# Altium PCB MDBT42Q - Copy (2).PcbDoc
Units mm, origin at the board's own origin, x right, y up, seen from the top; angles counter-clockwise.
Board outline 26.67 x 44.45 mm, 2 copper layers (Top Layer, Bottom Layer); 23 components, 17 nets, 145 pads, 0 vias.
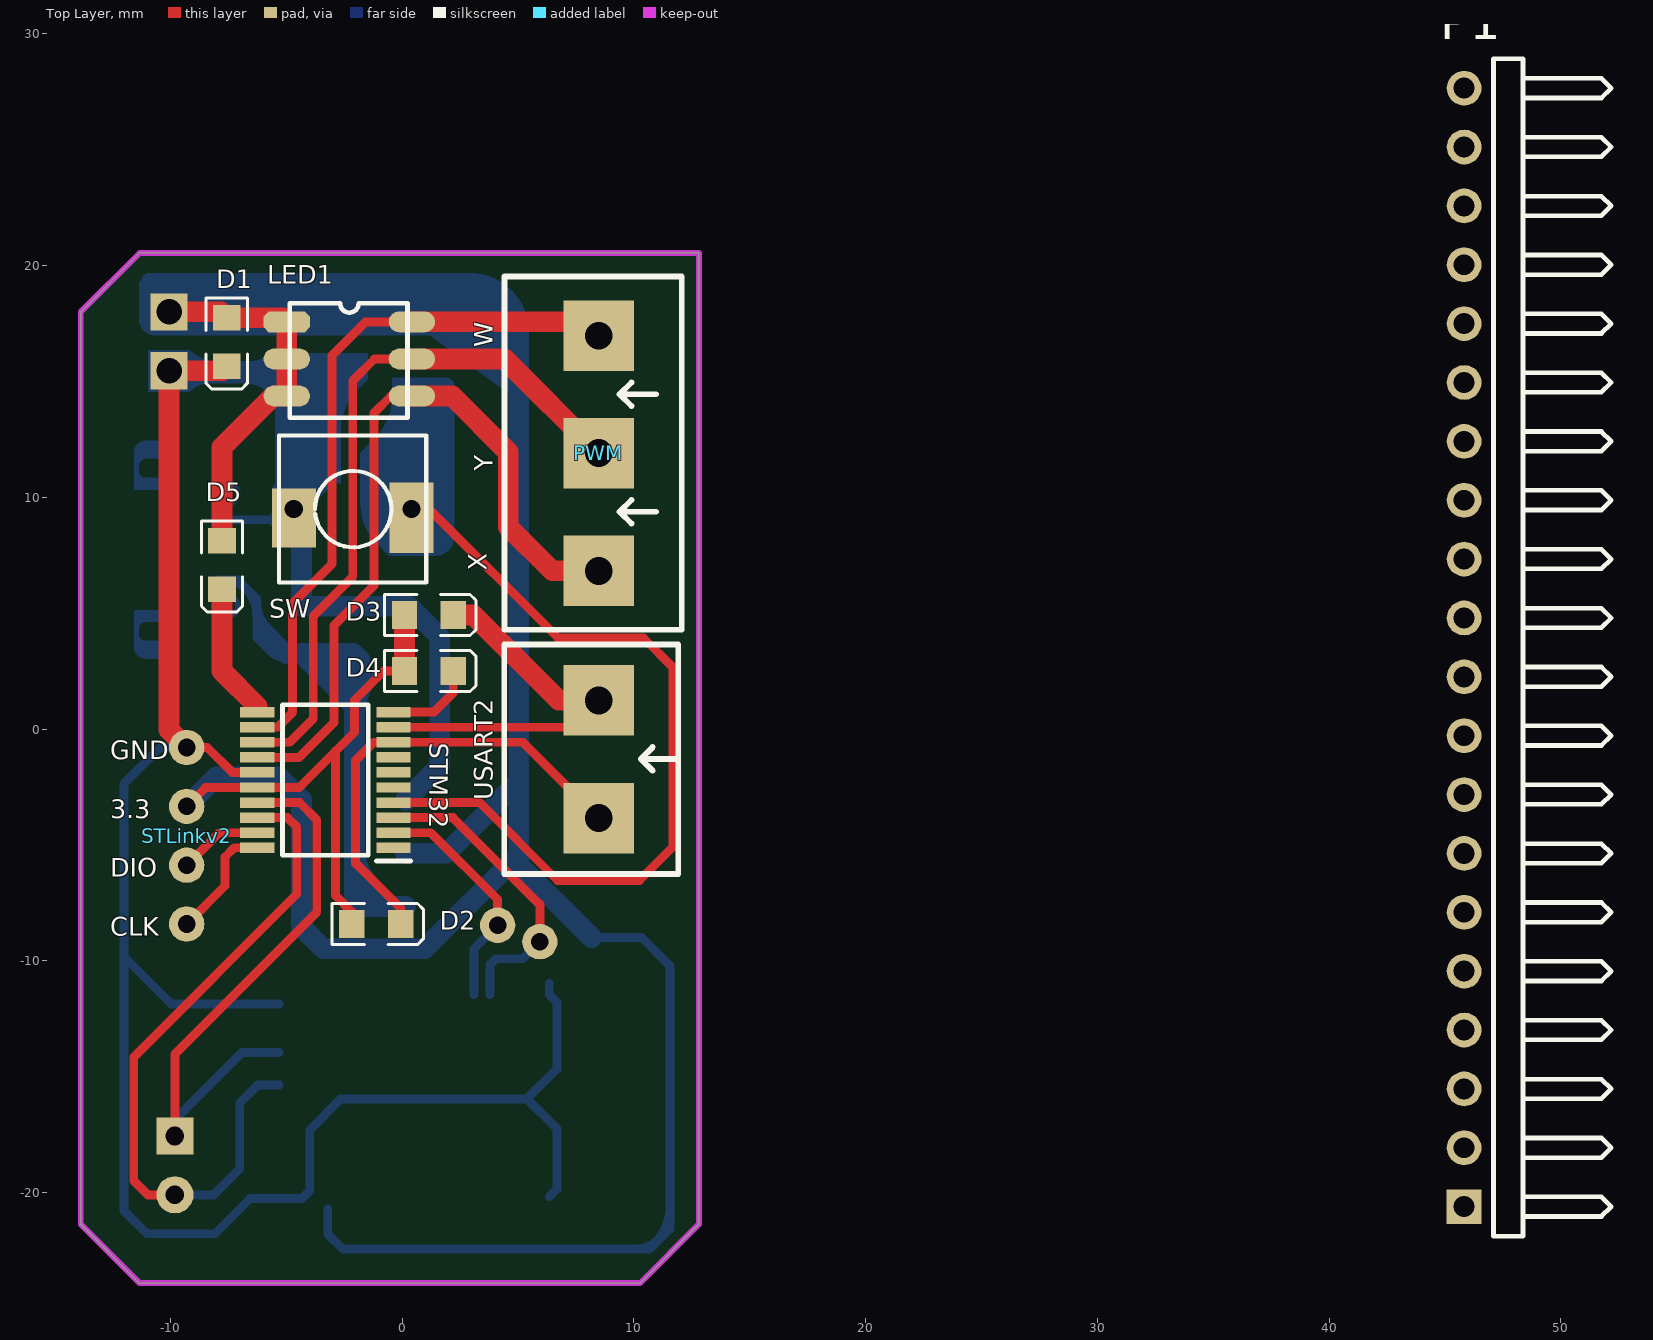
[diagram p0: Top Layer view]
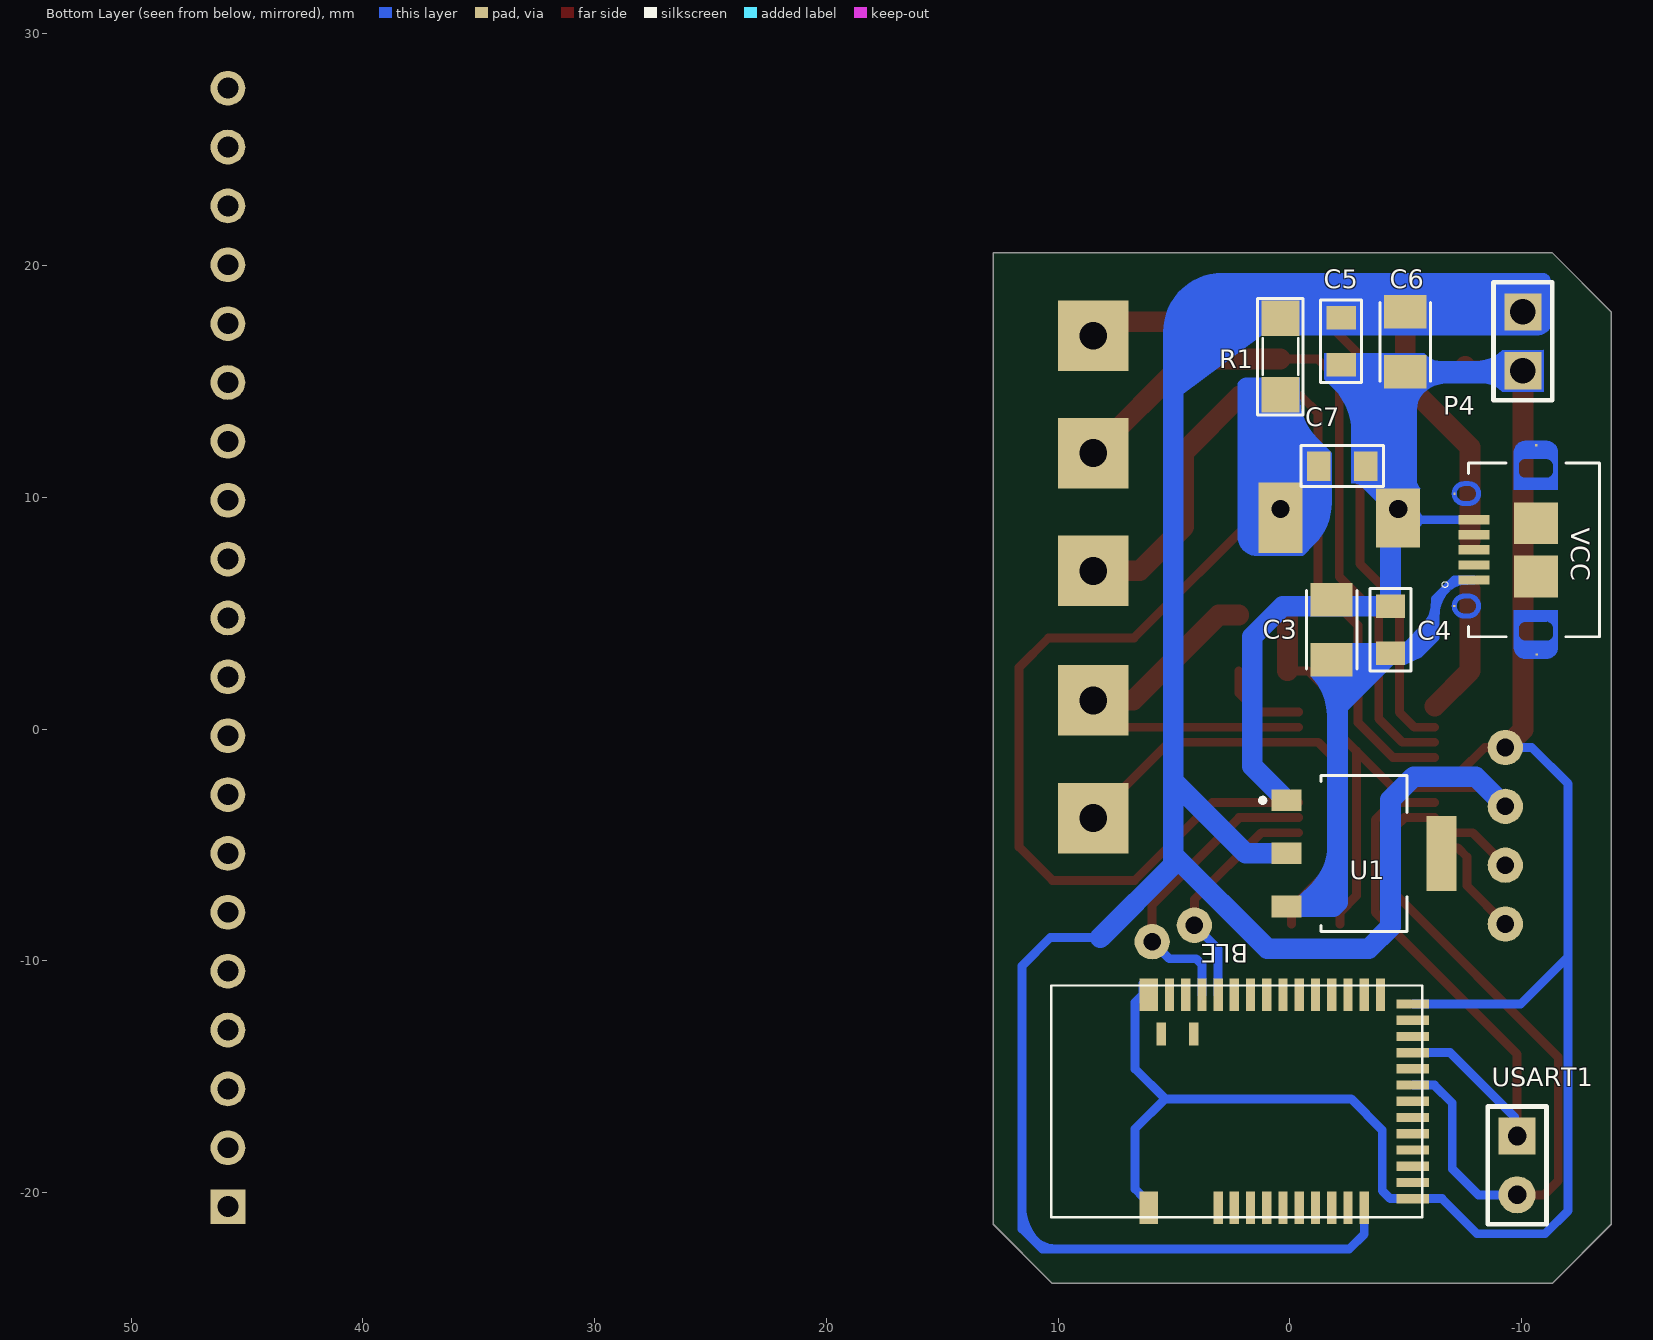
[diagram p1: Bottom Layer view, seen from below]

## Layer stack, top to bottom
Top Solder: solder mask 0.0102, Solder Resist, Dk 3.5
Top Layer: signal copper 0.0356
Dielectric1: dielectric 0.32, FR-4, Dk 4.8
Bottom Layer: signal copper 0.0356
Bottom Solder: solder mask 0.0102, Solder Resist, Dk 3.5

## Board outline
-11.328,-23.901 -13.868,-21.361 -13.868,18.009 -11.328,20.549 12.802,20.549 12.802,-20.091 12.802,-21.361 10.262,-23.901

## Design rules (kind name [scope] priority, off if disabled: settings)
Clearance [All] p1: gap=0 ignorepadtopadclearanceinfootprint=FALSE
PlaneClearance [All] p1: clearance=1
PlaneConnect [All] p1: planeconnectstyle=Direct reliefexpansion=0.508 reliefentries=4 reliefconductorwidth=0.254 reliefairgap=0.254
PolygonConnect [All] p1: connectstyle=Direct reliefconductorwidth=0.254 reliefentries=4 polygonreliefangle="90 Angle" airgapwidth=0.254
RoutingVias [All] p1: holewidth=0.711 width=1.27 viastyle="Through Hole" minholewidth=0.711 minwidth=1.27 maxholewidth=0.711 maxwidth=1.27
SolderMaskExpansion [All] p1: expansion=0.102
Width [All] p1: maxlimit=0.889 minlimit=0.381 preferedwidth=0.508 minimp=50.000000 maximp=50.000000 favimp=50.000000
28 further rules are at their usual default settings.

## Components (designator, comment, footprint, x,y, rotation, side; value= is the part's Value field where it differs from the comment)
BLE "MODULE_MDBT42Q" PCB_MDBT42Q_10X16 10.294,-16.055 r90 bottom
C3 "C3216X5R1A106K160AB" CAPC3216X180 -1.803,4.293 r90 bottom
C4 "2u2" 0805C-GENERIC -4.343,3.531 r90 bottom
C5 "2u2" 0805C-GENERIC -2.21,17.501 r270 bottom
C6 "C3216X5R1A106K160AB" CAPC3216X180 -4.978,16.714 r270 bottom
C7 "10u" 0805C-GENERIC -1.499,11.354 r180 bottom
D1 "LED SMD" LED_0805_Blue -7.569,16.705 r270 top
D2 "LED SMD" LED_0805_Blue -1.118,-8.407 r0 top
D3 "LED SMD" LED_0805_Blue 1.152,4.928 r0 top
D4 "LED SMD" LED_0805_Blue 1.152,2.515 r0 top
D5 "LED SMD" LED_0805_Blue -7.772,7.087 r270 top
LED1 "150141M173100" "LED RGB 5050" -2.184,15.977 r0 top
P1 "Header 20H" HDR1X20H 45.822,-20.599 r90 top
P4 "ZX62D-B-5P8" HRS_ZX62D-B-5P8 -7.942,7.74 r90 bottom
PWM "Header 3 - M" "Medium - Header 3" 8.484,6.833 r90 top
R1 "RESISTOR SMD" RES-SM-1206 0.406,14.427 r90 bottom
STLinkv2 "JP" "Jumper 4x1" -7.772,-7.391 r0 top
STM32 "STM32F070F6P6" SOP65P640X120-20N -3.31,-2.188 r180 top
SW "SW" SW2 0.406,9.5 r180 top
U1 "AMS1117-3.3" SOT229P700X180-4N -3.2,-5.359 r270 bottom
USART1 "" JP2-D1T#1 -9.804,-17.551 r270 bottom
USART2 "Header 2 - M" "Medium - Header 2" 8.484,-1.295 r270 top
VCC "JP2" JP2-D1T#2 -10.058,18.009 r270 bottom

## Footprints (in the part's own frame and the unit in brackets; to place one, negate y for a bottom-side part, rotate by r counter-clockwise, add the part's x,y. Pads: shape width x height; smd on the part's side, far side on the other; paste and mask are expansions set on the pad)
0805C-GENERIC [mil] "CAPACITOR 0805"
  rect 40x50 smd: 1(-10,0) 2(70,0)
  silkscreen extent -40,-35 100,35, body extent -11,-25 70,25, height 26
CAPC3216X180 [mm]
  rect 1.44x1.82 smd: 1(-1.295,0) 2(1.295,0)
  silkscreen extent -1.7,-1.09 1.7,1.09
HDR1X20H [mm] "Connector; Header; 20 Position; Right Angle"
  rect 1.5x1.5 hole 0.9: 1(0,0)
  round 1.5 hole 0.9: 2(2.54,0) 3(5.08,0) 4(7.62,0) 5(10.16,0) 6(12.7,0) 7(15.24,0) 8(17.78,0) 9(20.32,0) 10(22.86,0) 11(25.4,0) 12(27.94,0) 13(30.48,0) 14(33.02,0) 15(35.56,0) 16(38.1,0) 17(40.64,0) 18(43.18,0) 19(45.72,0) 20(48.26,0)
  silkscreen extent -1.27,-6.35 49.53,-1.27, body extent -1.27,-7 49.53,1.27, height 4.33
HRS_ZX62D-B-5P8 [mm]
  rect 0.4x1.35 smd: 1(-1.3,0) 2(-0.65,0) 3(0,0) 4(0.65,0) 5(1.3,0)
  round 0 all layers, no hole: None(-3.512,-2.675) None(-2.425,0.325) None(2.425,0.325) None(3.512,-2.675)
  rect 0.1x0.1 smd: P1(-2.425,0.85) P2(2.425,0.837) P3(-4.513,-2.712) P6(4.513,-2.688)
  rect 1.8x1.9 smd: P4(-1.15,-2.675) P5(1.15,-2.675)
  Top Layer region: -2.425,0.75 -2.425,0.95 -2.411,0.95 -2.384,0.949 -2.356,0.946 -2.329,0.941 -2.302,0.936 -2.276,0.929 -2.25,0.92 -2.224,0.91 -2.199,0.899 -2.174,0.887 -2.151,0.873 -2.128,0.858 -2.105,0.842 -2.084,0.824 -2.063,0.806 -2.044,0.787 -2.026,0.766 -2.008,0.745 -1.992,0.722 -1.977,0.699 -1.963,0.676 -1.951,0.651 -1.94,0.626 -1.93,0.6 -1.921,0.574 -1.914,0.548 -1.909,0.521 -1.904,0.494 -1.901,0.466 -1.9,0.439 -1.9,0.211 -1.901,0.184 -1.904,0.156 -1.909,0.129 -1.914,0.102 -1.921,0.076 -1.93,0.05 -1.94,0.024 -1.951,-0.001 -1.963,-0.026 -1.977,-0.049 -1.992,-0.072 -2.008,-0.095 -2.026,-0.116 -2.044,-0.137 -2.063,-0.156 -2.084,-0.174 -2.105,-0.192 -2.128,-0.208 -2.151,-0.223 -2.174,-0.237 -2.199,-0.249 -2.224,-0.26 -2.25,-0.27 -2.276,-0.279 -2.302,-0.286 -2.329,-0.291 -2.356,-0.296 -2.384,-0.299 -2.411,-0.3 -2.425,-0.3 -2.425,-0.1 -2.416,-0.1 -2.399,-0.099 -2.383,-0.097 -2.366,-0.095 -2.349,-0.091 -2.333,-0.087 -2.316,-0.081 -2.301,-0.075 -2.285,-0.068 -2.27,-0.061 -2.255,-0.052 -2.241,-0.043 -2.227,-0.033 -2.214,-0.022 -2.201,-0.011 -2.189,0.001 -2.178,0.014 -2.167,0.027 -2.157,0.041 -2.148,0.055 -2.139,0.07 -2.132,0.085 -2.125,0.101 -2.119,0.116 -2.113,0.133 -2.109,0.149 -2.105,0.166 -2.103,0.183 -2.101,0.199 -2.1,0.216 -2.1,0.434 -2.101,0.451 -2.103,0.467 -2.105,0.484 -2.109,0.501 -2.113,0.517 -2.119,0.534 -2.125,0.549 -2.132,0.565 -2.139,0.58 -2.148,0.595 -2.157,0.609 -2.167,0.623 -2.178,0.636 -2.189,0.649 -2.201,0.661 -2.214,0.672 -2.227,0.683 -2.241,0.693 -2.255,0.702 -2.27,0.711 -2.285,0.718 -2.301,0.725 -2.316,0.731 -2.333,0.737 -2.349,0.741 -2.366,0.745 -2.383,0.747 -2.399,0.749 -2.416,0.75
  Top Layer region: -2.425,-0.1 -2.425,-0.3 -2.439,-0.3 -2.466,-0.299 -2.494,-0.296 -2.521,-0.291 -2.548,-0.286 -2.574,-0.279 -2.6,-0.27 -2.626,-0.26 -2.651,-0.249 -2.676,-0.237 -2.699,-0.223 -2.722,-0.208 -2.745,-0.192 -2.766,-0.174 -2.787,-0.156 -2.806,-0.137 -2.824,-0.116 -2.842,-0.095 -2.858,-0.072 -2.873,-0.049 -2.887,-0.026 -2.899,-0.001 -2.91,0.024 -2.92,0.05 -2.929,0.076 -2.936,0.102 -2.941,0.129 -2.946,0.156 -2.949,0.184 -2.95,0.211 -2.95,0.439 -2.949,0.466 -2.946,0.494 -2.941,0.521 -2.936,0.548 -2.929,0.574 -2.92,0.6 -2.91,0.626 -2.899,0.651 -2.887,0.676 -2.873,0.699 -2.858,0.722 -2.842,0.745 -2.824,0.766 -2.806,0.787 -2.787,0.806 -2.766,0.824 -2.745,0.842 -2.722,0.858 -2.699,0.873 -2.676,0.887 -2.651,0.899 -2.626,0.91 -2.6,0.92 -2.574,0.929 -2.548,0.936 -2.521,0.941 -2.494,0.946 -2.466,0.949 -2.439,0.95 -2.425,0.95 -2.425,0.75 -2.434,0.75 -2.451,0.749 -2.467,0.747 -2.484,0.745 -2.501,0.741 -2.517,0.737 -2.534,0.731 -2.549,0.725 -2.565,0.718 -2.58,0.711 -2.595,0.702 -2.609,0.693 -2.623,0.683 -2.636,0.672 -2.649,0.661 -2.661,0.649 -2.672,0.636 -2.683,0.623 -2.693,0.609 -2.702,0.595 -2.711,0.58 -2.718,0.565 -2.725,0.549 -2.731,0.534 -2.737,0.517 -2.741,0.501 -2.745,0.484 -2.747,0.467 -2.749,0.451 -2.75,0.434 -2.75,0.216 -2.749,0.199 -2.747,0.183 -2.745,0.166 -2.741,0.149 -2.737,0.133 -2.731,0.116 -2.725,0.101 -2.718,0.085 -2.711,0.07 -2.702,0.055 -2.693,0.041 -2.683,0.027 -2.672,0.014 -2.661,0.001 -2.649,-0.011 -2.636,-0.022 -2.623,-0.033 -2.609,-0.043 -2.595,-0.052 -2.58,-0.061 -2.565,-0.068 -2.549,-0.075 -2.534,-0.081 -2.517,-0.087 -2.501,-0.091 -2.484,-0.095 -2.467,-0.097 -2.451,-0.099 -2.434,-0.1
  Top Layer region: 2.425,0.75 2.425,0.95 2.439,0.95 2.466,0.949 2.494,0.946 2.521,0.941 2.548,0.936 2.574,0.929 2.6,0.92 2.626,0.91 2.651,0.899 2.676,0.887 2.699,0.873 2.722,0.858 2.745,0.842 2.766,0.824 2.787,0.806 2.806,0.787 2.824,0.766 2.842,0.745 2.858,0.722 2.873,0.699 2.887,0.676 2.899,0.651 2.91,0.626 2.92,0.6 2.929,0.574 2.936,0.548 2.941,0.521 2.946,0.494 2.949,0.466 2.95,0.439 2.95,0.211 2.949,0.184 2.946,0.156 2.941,0.129 2.936,0.102 2.929,0.076 2.92,0.05 2.91,0.024 2.899,-0.001 2.887,-0.026 2.873,-0.049 2.858,-0.072 2.842,-0.095 2.824,-0.116 2.806,-0.137 2.787,-0.156 2.766,-0.174 2.745,-0.192 2.722,-0.208 2.699,-0.223 2.676,-0.237 2.651,-0.249 2.626,-0.26 2.6,-0.27 2.574,-0.279 2.548,-0.286 2.521,-0.291 2.494,-0.296 2.466,-0.299 2.439,-0.3 2.425,-0.3 2.425,-0.1 2.434,-0.1 2.451,-0.099 2.467,-0.097 2.484,-0.095 2.501,-0.091 2.517,-0.087 2.534,-0.081 2.549,-0.075 2.565,-0.068 2.58,-0.061 2.595,-0.052 2.609,-0.043 2.623,-0.033 2.636,-0.022 2.649,-0.011 2.661,0.001 2.672,0.014 2.683,0.027 2.693,0.041 2.702,0.055 2.711,0.07 2.718,0.085 2.725,0.101 2.731,0.116 2.737,0.133 2.741,0.149 2.745,0.166 2.747,0.183 2.749,0.199 2.75,0.216 2.75,0.434 2.749,0.451 2.747,0.467 2.745,0.484 2.741,0.501 2.737,0.517 2.731,0.534 2.725,0.549 2.718,0.565 2.711,0.58 2.702,0.595 2.693,0.609 2.683,0.623 2.672,0.636 2.661,0.649 2.649,0.661 2.636,0.672 2.623,0.683 2.609,0.693 2.595,0.702 2.58,0.711 2.565,0.718 2.549,0.725 2.534,0.731 2.517,0.737 2.501,0.741 2.484,0.745 2.467,0.747 2.451,0.749 2.434,0.75
  Top Layer region: 2.425,-0.1 2.425,-0.3 2.411,-0.3 2.384,-0.299 2.356,-0.296 2.329,-0.291 2.302,-0.286 2.276,-0.279 2.25,-0.27 2.224,-0.26 2.199,-0.249 2.174,-0.237 2.151,-0.223 2.128,-0.208 2.105,-0.192 2.084,-0.174 2.063,-0.156 2.044,-0.137 2.026,-0.116 2.008,-0.095 1.992,-0.072 1.977,-0.049 1.963,-0.026 1.951,-0.001 1.94,0.024 1.93,0.05 1.921,0.076 1.914,0.102 1.909,0.129 1.904,0.156 1.901,0.184 1.9,0.211 1.9,0.439 1.901,0.466 1.904,0.494 1.909,0.521 1.914,0.548 1.921,0.574 1.93,0.6 1.94,0.626 1.951,0.651 1.963,0.676 1.977,0.699 1.992,0.722 2.008,0.745 2.026,0.766 2.044,0.787 2.063,0.806 2.084,0.824 2.105,0.842 2.128,0.858 2.151,0.873 2.174,0.887 2.199,0.899 2.224,0.91 2.25,0.92 2.276,0.929 2.302,0.936 2.329,0.941 2.356,0.946 2.384,0.949 2.411,0.95 2.425,0.95 2.425,0.75 2.416,0.75 2.399,0.749 2.383,0.747 2.366,0.745 2.349,0.741 2.333,0.737 2.316,0.731 2.301,0.725 2.285,0.718 2.27,0.711 2.255,0.702 2.241,0.693 2.227,0.683 2.214,0.672 2.201,0.661 2.189,0.649 2.178,0.636 2.167,0.623 2.157,0.609 2.148,0.595 2.139,0.58 2.132,0.565 2.125,0.549 2.119,0.534 2.113,0.517 2.109,0.501 2.105,0.484 2.103,0.467 2.101,0.451 2.1,0.434 2.1,0.216 2.101,0.199 2.103,0.183 2.105,0.166 2.109,0.149 2.113,0.133 2.119,0.116 2.125,0.101 2.132,0.085 2.139,0.07 2.148,0.055 2.157,0.041 2.167,0.027 2.178,0.014 2.189,0.001 2.201,-0.011 2.214,-0.022 2.227,-0.033 2.241,-0.043 2.255,-0.052 2.27,-0.061 2.285,-0.068 2.301,-0.075 2.316,-0.081 2.333,-0.087 2.349,-0.091 2.366,-0.095 2.383,-0.097 2.399,-0.099 2.416,-0.1
  Top Layer region: -2.6,-1.725 -4.213,-1.725 -4.239,-1.726 -4.265,-1.729 -4.291,-1.733 -4.317,-1.739 -4.342,-1.745 -4.367,-1.754 -4.391,-1.763 -4.415,-1.774 -4.439,-1.785 -4.461,-1.799 -4.483,-1.813 -4.504,-1.828 -4.525,-1.845 -4.544,-1.862 -4.563,-1.881 -4.58,-1.9 -4.597,-1.921 -4.612,-1.942 -4.626,-1.964 -4.64,-1.986 -4.651,-2.01 -4.662,-2.034 -4.671,-2.058 -4.68,-2.083 -4.686,-2.108 -4.692,-2.134 -4.696,-2.16 -4.699,-2.186 -4.7,-2.212 -4.7,-2.675 -3.925,-2.675 -3.925,-2.217 -3.924,-2.201 -3.923,-2.186 -3.92,-2.17 -3.917,-2.155 -3.913,-2.14 -3.908,-2.125 -3.902,-2.11 -3.896,-2.096 -3.889,-2.082 -3.881,-2.068 -3.872,-2.055 -3.863,-2.042 -3.853,-2.03 -3.843,-2.018 -3.832,-2.007 -3.82,-1.997 -3.808,-1.987 -3.795,-1.978 -3.782,-1.969 -3.768,-1.961 -3.754,-1.954 -3.74,-1.948 -3.725,-1.942 -3.71,-1.937 -3.695,-1.933 -3.68,-1.93 -3.664,-1.927 -3.649,-1.926 -3.633,-1.925 -3.392,-1.925 -3.376,-1.926 -3.361,-1.927 -3.345,-1.93 -3.33,-1.933 -3.315,-1.937 -3.3,-1.942 -3.285,-1.948 -3.271,-1.954 -3.257,-1.961 -3.243,-1.969 -3.23,-1.978 -3.217,-1.987 -3.205,-1.997 -3.193,-2.007 -3.182,-2.018 -3.172,-2.03 -3.162,-2.042 -3.153,-2.055 -3.144,-2.068 -3.136,-2.082 -3.129,-2.096 -3.123,-2.11 -3.117,-2.125 -3.112,-2.14 -3.108,-2.155 -3.105,-2.17 -3.102,-2.186 -3.101,-2.201 -3.1,-2.217 -3.1,-2.675 -2.6,-2.675
  Top Layer region: 2.6,-3.625 4.213,-3.625 4.239,-3.624 4.265,-3.621 4.291,-3.617 4.317,-3.611 4.342,-3.605 4.367,-3.596 4.391,-3.587 4.415,-3.576 4.439,-3.565 4.461,-3.551 4.483,-3.537 4.504,-3.522 4.525,-3.505 4.544,-3.488 4.563,-3.469 4.58,-3.45 4.597,-3.429 4.612,-3.408 4.626,-3.386 4.64,-3.364 4.651,-3.34 4.662,-3.316 4.671,-3.292 4.68,-3.267 4.686,-3.242 4.692,-3.216 4.696,-3.19 4.699,-3.164 4.7,-3.138 4.7,-2.675 3.925,-2.675 3.925,-3.133 3.924,-3.149 3.923,-3.164 3.92,-3.18 3.917,-3.195 3.913,-3.21 3.908,-3.225 3.902,-3.24 3.896,-3.254 3.889,-3.268 3.881,-3.282 3.872,-3.295 3.863,-3.308 3.853,-3.32 3.843,-3.332 3.832,-3.343 3.82,-3.353 3.808,-3.363 3.795,-3.372 3.782,-3.381 3.768,-3.389 3.754,-3.396 3.74,-3.402 3.725,-3.408 3.71,-3.413 3.695,-3.417 3.68,-3.42 3.664,-3.423 3.649,-3.424 3.633,-3.425 3.392,-3.425 3.376,-3.424 3.361,-3.423 3.345,-3.42 3.33,-3.417 3.315,-3.413 3.3,-3.408 3.285,-3.402 3.271,-3.396 3.257,-3.389 3.243,-3.381 3.23,-3.372 3.217,-3.363 3.205,-3.353 3.193,-3.343 3.182,-3.332 3.172,-3.32 3.162,-3.308 3.153,-3.295 3.144,-3.282 3.136,-3.268 3.129,-3.254 3.123,-3.24 3.117,-3.225 3.112,-3.21 3.108,-3.195 3.105,-3.18 3.102,-3.164 3.101,-3.149 3.1,-3.133 3.1,-2.675 2.6,-2.675
  Top Layer region: -3.1,-2.675 -2.6,-2.675 -2.6,-3.625 -4.213,-3.625 -4.239,-3.624 -4.265,-3.621 -4.291,-3.617 -4.317,-3.611 -4.342,-3.605 -4.367,-3.596 -4.391,-3.587 -4.415,-3.576 -4.439,-3.565 -4.461,-3.551 -4.483,-3.537 -4.504,-3.522 -4.525,-3.505 -4.544,-3.488 -4.563,-3.469 -4.58,-3.45 -4.597,-3.429 -4.612,-3.408 -4.626,-3.386 -4.64,-3.364 -4.651,-3.34 -4.662,-3.316 -4.671,-3.292 -4.68,-3.267 -4.686,-3.242 -4.692,-3.216 -4.696,-3.19 -4.699,-3.164 -4.7,-3.138 -4.7,-2.675 -3.925,-2.675 -3.925,-3.157 -3.924,-3.172 -3.923,-3.186 -3.92,-3.2 -3.917,-3.214 -3.914,-3.228 -3.909,-3.242 -3.904,-3.255 -3.898,-3.268 -3.892,-3.281 -3.885,-3.294 -3.877,-3.306 -3.868,-3.317 -3.859,-3.329 -3.85,-3.339 -3.839,-3.35 -3.829,-3.359 -3.817,-3.368 -3.806,-3.377 -3.794,-3.385 -3.781,-3.392 -3.768,-3.398 -3.755,-3.404 -3.742,-3.409 -3.728,-3.414 -3.714,-3.417 -3.7,-3.42 -3.686,-3.423 -3.672,-3.424 -3.657,-3.425 -3.392,-3.425 -3.376,-3.424 -3.361,-3.423 -3.345,-3.42 -3.33,-3.417 -3.315,-3.413 -3.3,-3.408 -3.285,-3.402 -3.271,-3.396 -3.257,-3.389 -3.243,-3.381 -3.23,-3.372 -3.217,-3.363 -3.205,-3.353 -3.193,-3.343 -3.182,-3.332 -3.172,-3.32 -3.162,-3.308 -3.153,-3.295 -3.144,-3.282 -3.136,-3.268 -3.129,-3.254 -3.123,-3.24 -3.117,-3.225 -3.112,-3.21 -3.108,-3.195 -3.105,-3.18 -3.102,-3.164 -3.101,-3.149 -3.1,-3.133
  Top Layer region: 3.1,-2.675 2.6,-2.675 2.6,-1.725 4.213,-1.725 4.239,-1.726 4.265,-1.729 4.291,-1.733 4.317,-1.739 4.342,-1.745 4.367,-1.754 4.391,-1.763 4.415,-1.774 4.439,-1.785 4.461,-1.799 4.483,-1.813 4.504,-1.828 4.525,-1.845 4.544,-1.862 4.563,-1.881 4.58,-1.9 4.597,-1.921 4.612,-1.942 4.626,-1.964 4.64,-1.986 4.651,-2.01 4.662,-2.034 4.671,-2.058 4.68,-2.083 4.686,-2.108 4.692,-2.134 4.696,-2.16 4.699,-2.186 4.7,-2.212 4.7,-2.675 3.925,-2.675 3.925,-2.193 3.924,-2.178 3.923,-2.164 3.92,-2.15 3.917,-2.136 3.914,-2.122 3.909,-2.108 3.904,-2.095 3.898,-2.082 3.892,-2.069 3.885,-2.056 3.877,-2.044 3.868,-2.033 3.859,-2.021 3.85,-2.011 3.839,-2 3.829,-1.991 3.817,-1.982 3.806,-1.973 3.794,-1.965 3.781,-1.958 3.768,-1.952 3.755,-1.946 3.742,-1.941 3.728,-1.936 3.714,-1.933 3.7,-1.93 3.686,-1.927 3.672,-1.926 3.657,-1.925 3.392,-1.925 3.376,-1.926 3.361,-1.927 3.345,-1.93 3.33,-1.933 3.315,-1.937 3.3,-1.942 3.285,-1.948 3.271,-1.954 3.257,-1.961 3.243,-1.969 3.23,-1.978 3.217,-1.987 3.205,-1.997 3.193,-2.007 3.182,-2.018 3.172,-2.03 3.162,-2.042 3.153,-2.055 3.144,-2.068 3.136,-2.082 3.129,-2.096 3.123,-2.11 3.117,-2.125 3.112,-2.14 3.108,-2.155 3.105,-2.17 3.102,-2.186 3.101,-2.201 3.1,-2.217
  silkscreen extent -3.75,-5.43 3.75,1.38
JP2-D1T#1 [mm] "2 pins, 1 row, straight, gold plating"
  rect 1.6x1.6 hole 0.8: 1(0,0)
  round 1.6 hole 0.8: 2(2.54,0)
  silkscreen extent -1.27,-1.27 3.81,1.27, body extent -1.27,-1.27 3.81,1.27, height 8.54
JP2-D1T#2 [mm] "2 pins, 1 row, straight, gold plating"
  rect 1.6x1.6 hole 1.1: 1(0,0) 2(2.54,0)
  silkscreen extent -1.27,-1.27 3.81,1.27, body extent -1.27,-1.27 3.81,1.27, height 8.54
"Jumper 4x1" [mil]
  round 60 hole 30: 1(-60,260) 2(-60,160) 3(-60,60) 4(-60,-40)
"LED RGB 5050" [mm]
  oct 2x0.9 smd: 1(-2.794,1.6)
  oval 2x0.9 smd: 2(-2.794,0) 3(-2.794,-1.6) 4(2.606,-1.6) 5(2.606,0) 6(2.606,1.6)
  silkscreen extent -2.67,-2.54 2.41,2.4, body extent -2.78,-2.54 2.52,2.46, height 1.6
LED_0805_Blue [mm] "Chip LED, 2-Leads, Body 2.0x1.3mm, IPC Medium Density"
  rect 1.1x1.2 smd: 1(-1.05,0) 2(1.05,0)
  silkscreen extent -1.91,-0.89 2.03,0.89, body extent -1,-0.63 1,0.62, height 0.68
"Medium - Header 2" [mil]
  rect 120x120 hole 47.24: 1(-100,0) 2(100,0)
  silkscreen extent -195,-161 195,135, body extent -197,-160 197,135, height 394
"Medium - Header 3" [mil]
  rect 120x120 hole 47.24: 1(0,0) 2(200,0) 3(399.5,0)
  silkscreen extent -100,-141 500,160, body extent -95,-138 495,157, height 394
PCB_MDBT42Q_10X16 [mm]
  rect 1.4x0.8 smd: 1(-4.6,-4.2) 39(4.6,-4.2)
  rect 1.4x0.4 smd: 2(-4.6,-7.2) 3(-4.6,-7.9) 4(-4.6,-8.6) 5(-4.6,-9.3) 6(-4.6,-10) 7(-4.6,-10.7) 8(-4.6,-11.4) 9(-4.6,-12.1) 10(-4.6,-12.8) 11(-4.6,-13.5) 25(4.6,-14.2) 26(4.6,-13.5) 27(4.6,-12.8) 28(4.6,-12.1) 29(4.6,-11.4) 30(4.6,-10.7) 31(4.6,-10) 32(4.6,-9.3) 33(4.6,-8.6) 34(4.6,-7.9) 35(4.6,-7.2) 36(4.6,-6.5) 37(4.6,-5.8) 38(4.6,-5.1)
  rect 0.4x1.4 smd: 12(-4.2,-15.6) 13(-3.5,-15.6) 14(-2.8,-15.6) 15(-2.1,-15.6) 16(-1.4,-15.6) 17(-0.7,-15.6) 18(0,-15.6) 19(0.7,-15.6) 20(1.4,-15.6) 21(2.1,-15.6) 22(2.8,-15.6) 23(3.5,-15.6) 24(4.2,-15.6)
  rect 1x0.4 smd: 40(2.9,-4.75) 41(2.9,-6.15)
  silkscreen extent -5,-16 5,0
RES-SM-1206 [mil]
  rect 60x65 smd: 1(0,0) 2(130,0)
  silkscreen extent -34,-38 164,39, body extent 2,-31 128,31, height 40
SOP65P640X120-20N [mm]
  rect 1.475x0.45 smd: 1(-2.938,2.925) 2(-2.938,2.275) 3(-2.938,1.625) 4(-2.938,0.975) 5(-2.938,0.325) 6(-2.938,-0.325) 7(-2.938,-0.975) 8(-2.938,-1.625) 9(-2.938,-2.275) 10(-2.938,-2.925) 11(2.938,-2.925) 12(2.938,-2.275) 13(2.938,-1.625) 14(2.938,-0.975) 15(2.938,-0.325) 16(2.938,0.325) 17(2.938,0.975) 18(2.938,1.625) 19(2.938,2.275) 20(2.938,2.925)
  silkscreen extent -3.68,-3.25 1.85,3.5
SOT229P700X180-4N [mm]
  rect 0.93x1.31 smd: 1(-2.29,-3.345) 2(0,-3.345) 3(2.29,-3.345)
  rect 3.24x1.31 smd: 4(0,3.345)
  silkscreen extent -3.36,-4.47 3.36,1.86
SW2 [mil] "SW button 2pin, 250x 250 mil"
  rect 75x120 hole 31 copper offset 0,15: 1(0,0)
  rect 75x100 hole 31 copper offset 0,15: 2(200,0)
  silkscreen extent -25,-125 225,125

## Part data
BLE: "MDBT42Q"
C3 C6: "C Series 1206 10 uF 10 V ±10 % Tolerance X5R SMT Multilayer Ceramic Capacitor"
C4 C5 C7: library part 0805C-2U2-6V3-X5R-PAN, "CAPACITOR 0805 CERAMIC"
D1 D2 D3 D4 D5: "LED"
LED1: library part "LED RGB 5050"
P1: "Header, 20-Pin, Right Angle"
P4: "SMD+DIP Micro USB; MICRO-B-SMD"
PWM: "Header, 3-Pin, Medium"
R1: "Resistor"
STLinkv2: library part "Jumper 4x1"
STM32: "STMICROELECTRONICS - STM32F070F6P6 - MCU, 32BIT, CORTEX-M0, 48MHZ, TSSOP-20"
SW: library part "Tact SW - 2Pin", "Switch button 2 pin"
U1: "Sot223/Pkg 1-Amp 3.3-Volt Low Drop Out Voltage Regulatator"
USART1: library part JP2, "WR-PHD 2.54 mm Angled Socket Header"
USART2: "Header, 2-Pin, Medium"
VCC: "WR-PHD 2.54 mm Angled Socket Header"

## Free pads (board coordinates)
  round 1.524 hole 0.762: 3(5.944,-9.169) MD(4.119,-8.458)

## Nets (pads, with @x,y where several pads share a name; then routed paths per layer and width w, separated by ;. In a path a pad name is that pad's centre, name@x,y a point inside that pad or via, vN(x,y) a via of type N, cw(c..) or ccw(c..) an arc to the next point about the centre after c; other vN are vias at no path point)
5.0V: C3.1 C4.1 P4.1 U1.3 | length 22.5
  Bottom Layer w0.381: P4.1 -7.1,6.44 -6.274,5.613 -6.274,3.962 -5.588,3.277 C4.1
  Bottom Layer w0.889: C3.1@-1.803,2.973 -2.107,3.277 C4.1 -2.057,0.991 -2.057,-7.468 -1.876,-7.649 U1.3
32>52: BLE.21 STM32.17 USART1.1 | length 25.7
  Top Layer w0.381: USART1.1@-9.423,-17.551 -9.804,-17.17 -9.804,-14.021 -3.683,-7.899 -3.683,-3.912 -4.431,-3.163 STM32.17
  Bottom Layer w0.381: USART1.1@-9.423,-17.551 -9.703,-17.272 -9.703,-16.739 -6.92,-13.955 BLE.21
52>32: BLE.19 STM32.18 USART1.2 | length 30.6
  Top Layer w0.381: USART1.2@-9.423,-20.091 USART1.2 -10.973,-20.091 -11.582,-19.482 -11.582,-14.148 -4.547,-7.112 -4.547,-4.216 -4.95,-3.813 STM32.18
  Bottom Layer w0.381: USART1.2 -8.128,-20.091 -7.007,-18.971 -7.007,-16.126 -6.237,-15.355 BLE.19
+3.3V: BLE.11 C5.1 C6.1 D1.1 D2.1 D3.1 D4.1 D5.1 LED1.1 LED1.2 LED1.3 R1.2 STLinkv2.2 STM32.16 U1.2 VCC.1 | length 141.3
  Top Layer w0.381: STLinkv2.2 -8.482,-2.513 STM32.16 -4.444,-2.513 -2.87,-0.94 ; D2.1 -2.168,-7.891 -2.87,-7.188 -2.87,-0.94 ; D4.1 -0.787,2.515 -2.057,1.245 -2.057,-0.127 -2.87,-0.94
  Top Layer w0.889: VCC.1 -7.823,18.009 D1.1 -5.156,17.755 LED1.1 LED1.2 LED1.3 -5.562,14.377 -7.772,12.167 D5.1 ; D4.1 D3.1
  Bottom Layer w0.381: BLE.11@-3.206,-20.689 -3.206,-21.787 -2.565,-22.428 10.683,-22.428 11.552,-21.56 11.552,-10.203 10.335,-8.987 8.174,-8.987
  Bottom Layer w0.889: VCC.1 C6.1 -4.724,17.755 C5.1 -2.184,17.729 R1.2 2.209,17.73 5.029,14.91 5.029,-2.235 ; STLinkv2.2 -8.023,-2.054 -5.338,-2.054 -4.343,-3.048 -4.343,-8.534 -3.404,-9.474 0.965,-9.474 5.029,-5.41 ; U1.2 1.905,-5.359 5.029,-2.235 ; 8.174,-8.987 5.029,-5.842 5.029,-5.41 ; 5.029,-5.41 5.029,-2.235
CLK: STLinkv2.4 STM32.20 | length 5.1
  Top Layer w0.381: STLinkv2.4 -7.645,-6.756 -7.645,-5.512 -7.247,-5.113 STM32.20
DIO: STLinkv2.3 STM32.19 | length 3.6
  Top Layer w0.381: STLinkv2.3 -7.892,-4.463 STM32.19
GND: BLE.1 BLE.12 BLE.24 BLE.39 C3.2 C4.2 C5.2 C6.2 C7.2 D1.2 P4.5 STLinkv2.1 STM32.15 SW.2 U1.1 VCC.2 | length 122
  Top Layer w0.381: STLinkv2.1 -8.407,-0.787 -7.331,-1.863 STM32.15
  Top Layer w0.889: STLinkv2.1 -10.058,-0.025 VCC.2 -7.755,15.469 D1.2
  Bottom Layer w0.381: STLinkv2.1 -10.439,-0.787 -12.007,-2.355 -12.007,-9.804 ; P4.5 SW.2@-5.311,9.04 ; BLE.24 -9.956,-11.855 -12.007,-9.804 ; BLE.1@6.345,-20.17 6.68,-19.835 6.68,-17.247 5.385,-15.951 ; BLE.39@6.345,-10.97 6.345,-11.451 6.68,-11.786 6.68,-14.656 5.385,-15.951 ; -12.007,-9.804 -12.007,-20.77 -11.008,-21.768 -8.077,-21.768 -6.565,-20.255 BLE.12 -4.33,-20.255 -3.988,-19.914 -3.988,-17.297 -2.642,-15.951 5.385,-15.951
  Bottom Layer w0.889: VCC.2 -10.008,15.419 C6.2 ; SW.2@-5.311,9.04 -4.928,9.423 -4.928,9.5 -4.978,9.55 C6.2 ; C7.2@-3.251,10.922 SW.2 -4.343,9.169 C4.2 0.305,5.309 1.626,3.988 1.626,-1.588 U1.1 ; C5.2 -4.674,15.723 C6.2
MD_RESET: BLE.35 pad.MD STM32.2 | length 10.2
  Top Layer w0.381: STM32.2 1.238,-4.463 4.119,-7.345 pad.MD
  Bottom Layer w0.381: BLE.35 3.094,-9.484 pad.MD
NetC7_1: C7.1 R1.1 STM32.4 SW.1 | length 43.1
  Top Layer w0.381: STM32.4 3.341,-3.163 6.706,-6.528 10.236,-6.528 11.684,-5.08 11.684,2.667 10.414,3.937 6.731,3.937 1.168,9.5 SW.1
  Bottom Layer w0.889: C7.1@-1.219,11.125 SW.1 R1.1
PA2: D2.2 STM32.8 USART2.2 | length 20
  Top Layer w0.381: D2.2 -0.068,-7.73 -2.007,-5.791 -2.007,-1.346 -1.224,-0.563 STM32.8 5.212,-0.563 USART2.2
PA3: D3.2 STM32.9 USART2.1 | length 17.1
  Top Layer w0.381: STM32.9 7.326,0.087 USART2.1
  Top Layer w0.889: D3.2 3.073,4.928 6.756,1.245 USART2.1
PA4: D4.2 STM32.10 | length 3.9
  Top Layer w0.381: STM32.10 1.372,0.737 2.202,1.567 D4.2
PA5: D5.2 STM32.11 | length 5.9
  Top Layer w0.381: STM32.11 -6.248,0.991
  Top Layer w0.889: D5.2 -7.772,2.515 -6.248,0.991
PWM_WHITE: LED1.6 PWM.3 STM32.12 | length 30.2
  Top Layer w0.381: STM32.12 -5.374,0.087 -4.724,0.737 -4.724,5.436 -3.023,7.137 -3.023,16.129 -1.575,17.577 LED1.6
  Top Layer w0.889: LED1.6 7.887,17.577 PWM.3
PWM_X: LED1.4 PWM.1 STM32.14 | length 33
  Top Layer w0.381: STM32.14 -4.439,-1.213 -2.946,0.279 -2.946,4.47 -1.219,6.198 -1.219,13.64 -0.482,14.377 LED1.4
  Top Layer w0.889: LED1.4 2.159,14.377 4.572,11.963 4.572,8.738 6.477,6.833 PWM.1
PWM_YELLOW: LED1.5 PWM.2 STM32.13 | length 30.8
  Top Layer w0.381: STM32.13 -4.856,-0.563 -3.835,0.457 -3.835,4.877 -2.134,6.579 -2.134,15.037 -1.194,15.977 LED1.5
  Top Layer w0.889: LED1.5 4.42,15.977 PWM.2
SWDCLK: BLE.36 pad.3 STM32.3 | length 13.3
  Top Layer w0.381: STM32.3 2.188,-3.813 5.944,-7.569 pad.3
  Bottom Layer w0.381: BLE.36 3.794,-10.151 4.039,-9.906 5.207,-9.906 pad.3
pads on no net: BLE.2 BLE.3 BLE.4 BLE.5 BLE.6 BLE.7 BLE.8 BLE.9 BLE.10 BLE.13 BLE.14 BLE.15 BLE.16 BLE.17 BLE.18 BLE.20 BLE.22 BLE.23 BLE.25 BLE.26 BLE.27 BLE.28 BLE.29 BLE.30 BLE.31 BLE.32 BLE.33 BLE.34 BLE.37 BLE.38 BLE.40 BLE.41 P1.1 P1.2 P1.3 P1.4 P1.5 P1.6 P1.7 P1.8 P1.9 P1.10 P1.11 P1.12 P1.13 P1.14 P1.15 P1.16 P1.17 P1.18 P1.19 P1.20 P4.2 P4.3 P4.4 P4.None P4.P1 P4.P2 P4.P3 P4.P4 P4.P5 P4.P6 STM32.1 STM32.5 STM32.6 STM32.7 U1.4

## Keep-outs
Top Layer:
  lines w0.254: 12.802,-20.091 12.802,20.549 -11.328,20.549 -13.868,18.009 -13.868,-21.361 -11.328,-23.901 10.262,-23.901 12.802,-21.361 12.802,-20.091 ; 12.802,-20.091 12.802,-20.091

## Other copper
Bottom Layer:
  region net +3.3V: 11.377,-20.295 11.377,-20.585 cw(c9.352,-20.585) 10.784,-22.017 ccw(c10.875,-21.925) 10.875,-22.055 11.062,-22.055 11.6,-21.422
  region net +3.3V: 10.986,-21.859 cw(c10.06,-20.933) 10.06,-22.243 9.688,-22.243 ccw(c9.804,-22.243) 9.722,-22.325 9.853,-22.456 cw(c9.92,-22.524) 9.92,-22.428 10.683,-22.428
  region net 5.0V: -0.401,-7.196 -0.938,-6.659 cw(c0.727,-4.994) -1.628,-4.994 ccw(c-1.628,-5.104) -1.706,-5.026 -2.035,-5.354 ccw(c-1.979,-5.41) -2.057,-5.41 -2.057,-7.468 -0.564,-7.468 cw(c-0.564,-7.658) -0.429,-7.523
  region net 5.0V: -0.894,2.291 ccw(c0.823,0.574) -1.605,0.574 -1.605,-0.086 ccw(c-3.482,-0.086) -2.155,1.24 -3.82,2.906 -3.623,3.103 cw(c-3.007,2.487) -3.007,3.358
  region net 5.0V: -4.978,3.785 -5.714,4.521 cw(c-4.83,5.405) -6.081,5.405 ccw(c-6.081,5.276) -6.172,5.367 -6.274,5.265 -6.274,4.932 ccw(c-3.759,4.76) -5.659,3.104 -4.978,2.791 -4.742,3.365
  region net 5.0V: -6.874,5.94 cw(c-7.863,4.951) -6.464,4.951 -6.464,5.153 cw(c-5.814,5.153) -6.274,5.613
  region net 5.0V: -6.081,5.232 -6.081,4.821 ccw(c-4.199,4.821) -5.53,3.49 -5.81,3.77 ccw(c-6.274,3.306) -6.274,3.962
  region net 5.0V: -7.656,6.243 cw(c-7.656,5.078) -6.832,5.902 -6.91,5.98 cw(c-6.45,6.44) -7.1,6.44
  region net NetC7_1: -0.429,15.166 -0.429,14.359 cw(c-2.969,14.359) -1.173,12.563 -1.758,11.979 ccw(c-1.653,11.874) -1.801,11.874 -1.801,9.772 ccw(c0.739,9.772) -1.057,7.976 -0.597,7.516 ccw(c-0.499,7.614) -0.499,7.475 1.402,7.475 ccw(c1.402,8.329) 2.256,8.329 2.256,14.803 ccw(c1.892,14.803) 1.892,15.166
  region net GND: -5.888,16.142 cw(c-6.513,16.767) -6.513,15.883 -8.01,15.883 cw(c-8.01,17.522) -9.169,16.363 -10.955,16.368 -10.96,14.562 -9.159,14.567 cw(c-8.301,13.708) -8.301,14.922 -6.784,14.922 cw(c-6.784,13.483) -5.766,14.501 cw(c-6.465,13.802) -5.476,13.802 -5.476,10.749 cw(c-5.979,10.749) -5.624,10.394 -5.624,10.371 -3.261,10.371 cw(c-2.654,9.764) -2.654,10.622 -2.654,12.877 cw(c-0.114,12.877) -1.91,14.673 -1.476,15.108 -1.476,16.231 -5.806,16.231
  region net +3.3V: -9.423,16.993 -10.643,16.993 cw(c-10.643,17.704) -11.354,17.704 -11.354,19.228 cw(c-11.252,19.228) -11.252,19.329 cw(c-10.897,19.329) -10.897,19.685 2.921,19.685 cw(c2.921,17.145) 5.461,17.145 5.461,14.859 cw(c5.08,14.859) 5.08,14.478 4.597,14.478 1.229,16.97

## Silkscreen, mask and mechanical layers (free items; w line width, h text height)
Top Overlay:
  text "W" at 3.912,16.485 h0.8 r90
  text "Y" at 3.912,11.151 h0.8 r90
  text "X" at 3.658,6.833 h0.8 r90
  text "GND" at -12.598,-1.295 h0.8
  text "3.3" at -12.598,-3.835 h0.8
  text "DIO" at -12.598,-6.375 h0.8
  text "CLK" at -12.598,-8.915 h0.8

## Text inside footprints (layer, text, board x,y; h text height)
BLE: Mechanical 2 "No ground pad" at -2.154,-17.014 h0.8 r179.79; Mechanical 3 "No ground pad" at -2.068,-13.976 h0.8 r179.61